# EAGLE board sound (EAGLE 5.11)
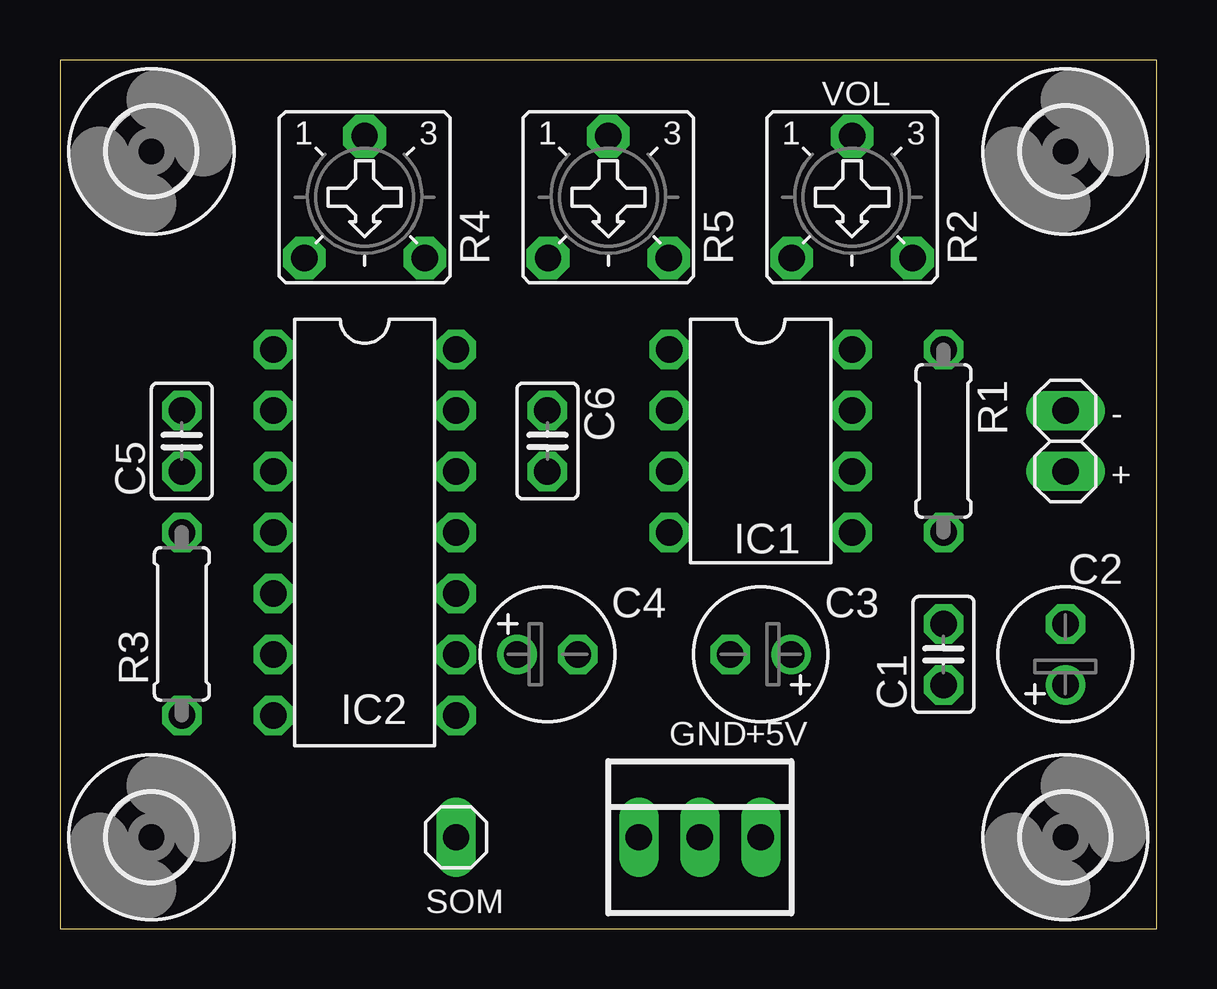
[diagram p0: board, top side]
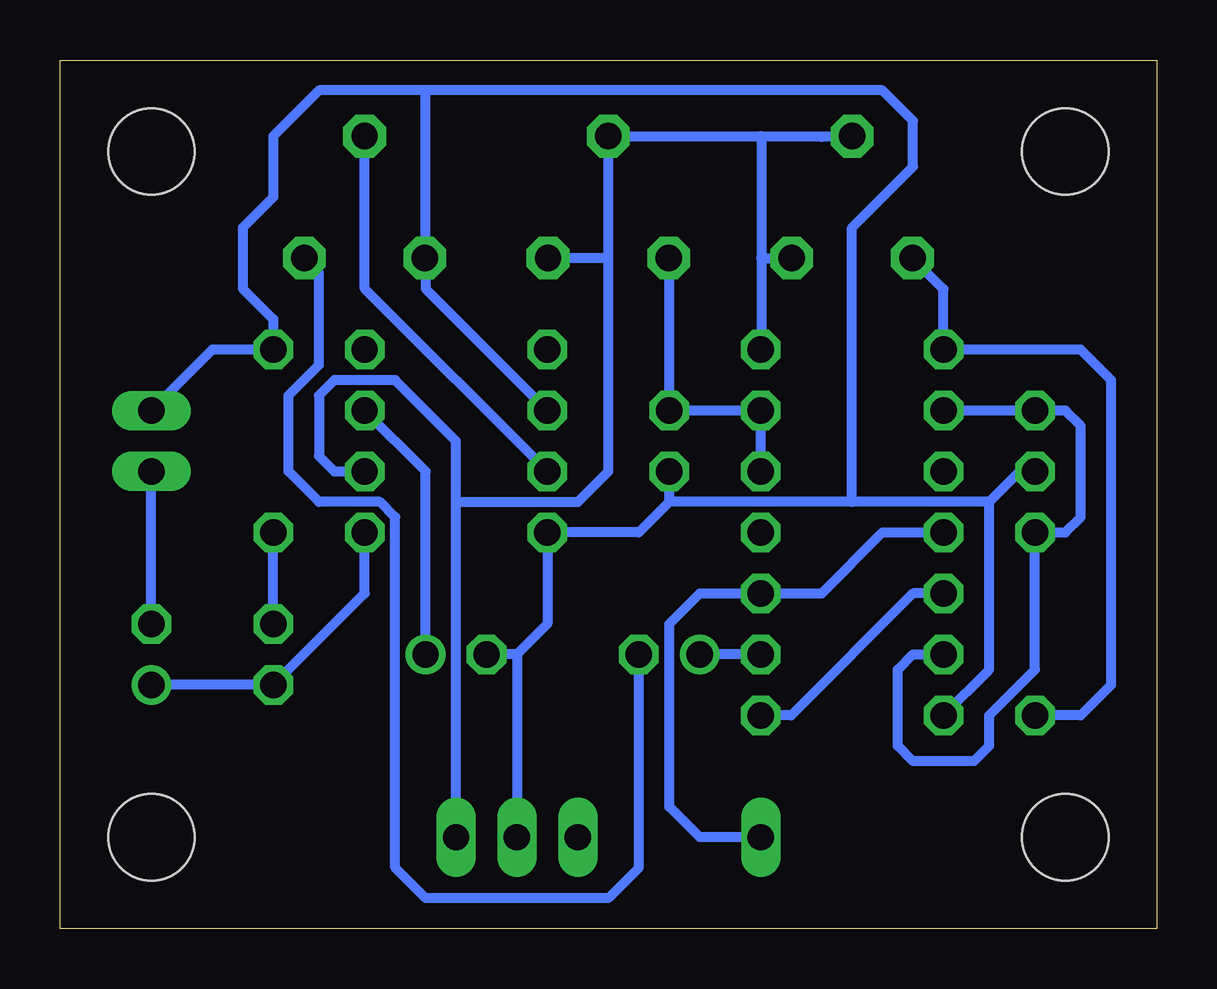
[diagram p1: board, bottom side, seen from below]

Size 45.72 x 36.2 mm. Coordinates in mm from the lower left corner, seen from the top.
Outline: 0,0 45.72,0 45.72,36.2 0,36.2 0,0
Copper layers (1*16): Top 0.035mm / dielectric 1.5mm / Bottom 0.035mm
Design rules "default": minimum track width 10mil, minimum drill 24mil, track to track 8mil, track to pad 8mil, pad to pad 8mil, via to via 8mil, smd to smd 8mil, copper to edge 40mil, drill to drill 8mil, minimum pad ring 10mil, minimum via ring 8mil, stop-mask expansion 4mil, vias tented up to drill 0mil, thermal gap 10mil

## Footprints (pad centres in the part's own frame; a part is rotated, then mirrored left to right if it is on the bottom)
C025-025X050 = drill 1.1 octagon: 1 -1.27,0; 2 1.27,0
E2,5-6 = drill 1.1 round: + -1.27,0 | drill 1.1 pad 1.6 octagon: - 1.27,0
DIL08 = drill 1.1 octagon: 1 -3.81,-3.81; 2 -1.27,-3.81; 3 1.27,-3.81; 4 3.81,-3.81; 5 3.81,3.81; 6 1.27,3.81; 7 -1.27,3.81; 8 -3.81,3.81
DIL14 = drill 1.1 octagon: 1 -7.62,-3.81; 2 -5.08,-3.81; 3 -2.54,-3.81; 4 0,-3.81; 5 2.54,-3.81; 6 5.08,-3.81; 7 7.62,-3.81; 8 7.62,3.81; 9 5.08,3.81; 10 2.54,3.81; 11 0,3.81; 12 -2.54,3.81; 13 -5.08,3.81; 14 -7.62,3.81
1X01 = drill 1.1 long: 1 0,0
0207/7 = drill 1.1 octagon: 1 -3.81,0; 2 3.81,0
CT6 = drill 1.1 pad 1.778 octagon: A 2.515,2.54; E -2.515,2.54; S 0,-2.54
1X02 = drill 1.1 long: 1 -1.27,0; 2 1.27,0
3,6 = hole 3.6: 0,0
22-23-2031 = drill 1.1 long: 1 -2.54,0; 2 0,0; 3 2.54,0

## Placement (x,y rotation side)
C1  22nF  [C025-025X050]  36.83,11.43 90 top
C2  100uF  [E2,5-6]  41.91,11.43 90 top
C3  10uF  [E2,5-6]  29.21,11.43 180 top
C4  1uF  [E2,5-6]  20.32,11.43 0 top
C5  10nF  [C025-025X050]  5.08,20.32 90 top
C6  100nF  [C025-025X050]  20.32,20.32 270 top
IC1  LM386  [DIL08]  29.21,20.32 270 top
IC2  NE556  [DIL14]  12.7,16.51 270 top
JP1  [1X01]  16.51,3.81 0 top
R1  47  [0207/7]  36.83,20.32 270 top
R2  [CT6]  33.02,30.48 180 top
R3  1k  [0207/7]  5.08,12.7 90 top
R4  470k  [CT6]  12.7,30.48 180 top
R5  470k  [CT6]  22.86,30.48 180 top
SP1  8 OHM  [1X02]  41.91,20.32 90 top
U$1  [3,6]  3.81,3.81 0 top
U$2  [3,6]  41.91,3.81 0 top
U$3  [3,6]  41.91,32.38 0 top
U$4  [3,6]  3.81,32.38 0 top
X5  22-23-2031  [22-23-2031]  26.67,3.81 0 top

## Library data of the parts
C1-C6 IC1 IC2 JP1 R1-R5 SP1 X5 = caixa
U$1-U$4 = ruido

## Nets
+5V: IC1.6 IC2.14 R4.E R4.S R5.E R5.S X5.3
+12V: X5.1
GND: C3.- C5.1 C6.2 IC1.2 IC1.4 IC2.7 R1.1 R2.A SP1.2 X5.2
N$1: C1.2 R1.2
N$2: C3.+ IC1.7
N$3: C1.1 C2.+ IC1.5
N$4: IC2.1 R3.1 R4.A
N$5: C5.2 IC2.2 IC2.6 R3.2
N$6: IC1.3 R2.S
N$7: C4.- R2.E
N$8: C2.- SP1.1
N$12: IC2.5 IC2.8
N$13: C4.+ IC2.9
N$15: C6.1 IC2.12 IC2.13 R5.A
SOM: IC2.4 IC2.10 JP1.1

## Tracks (layer width: path | path; a pad name or v marks a point on that pad's centre or on a via)
+5V
  Bottom 0.406: 13.97,32.99 R4.S 16.51,33.02 | R5.S 16.51,33.02 | R5.S 22.86,32.99 | 16.51,33.02 16.48,32.99 16.48,27.94 | 29.21,17.78 29.21,20.32 31.75,22.86 34.29,22.86 34.92,22.23 34.92,19.68 34.29,19.05 IC1.6 | X5.3 29.21,17.78 | 29.21,17.78 24.13,17.78 22.86,19.05 22.86,27.94 | 22.86,27.94 R5.S | 22.86,27.94 R5.E | IC2.14 16.48,24.13 16.48,27.94 | 16.48,27.94 R4.E
GND
  Bottom 0.406: 26.67,11.43 25.4,12.7 IC1.4 21.59,16.51 20.32,17.78 | 26.67,11.43 C3.- | 26.67,11.43 X5.2 | 20.32,17.78 C6.2 | IC2.7 6.99,10.79 6.99,17.78 | 6.99,17.78 12.7,17.78 | 12.7,17.78 20.32,17.78 | SP1.2 39.37,24.13 R1.1 36.83,25.4 38.1,26.67 38.1,29.21 36.83,30.48 36.83,33.02 34.92,34.92 30.48,34.92 | 30.48,34.92 11.43,34.92 10.16,33.66 10.16,31.75 12.7,29.21 12.7,17.78 | C5.1 5.71,19.05 6.99,17.78 | IC1.2 30.48,26.67 30.48,27.91 R2.A 30.5,34.9 30.48,34.92
N$1
  Bottom 0.406: C1.2 R1.2
N$2
  Bottom 0.406: C3.+ 30.48,19.05 IC1.7
N$3
  Bottom 0.406: IC1.5 33.02,13.97 C1.1 C2.+
N$4
  Bottom 0.406: R3.1 3.17,8.89 1.91,10.16 1.91,22.86 3.17,24.13 IC2.1 8.89,26.64 R4.A
N$5
  Bottom 0.406: IC2.2 C5.2 3.81,21.59 3.17,20.95 3.17,17.14 3.81,16.51 R3.2 5.08,10.79 6.99,8.89 6.99,7.62 7.62,6.99 10.16,6.99 10.79,7.62 10.79,10.79 10.16,11.43 IC2.6
N$6
  Bottom 0.406: IC1.3 33.02,26.67 R2.S
N$7
  Bottom 0.406: C4.- 21.59,2.54 22.86,1.27 30.48,1.27 31.75,2.54 31.75,17.14 32.38,17.78 34.92,17.78 36.2,19.05 36.2,22.23 34.92,23.5 34.92,27.33 R2.E
N$8
  Bottom 0.406: C2.- SP1.1
N$12
  Bottom 0.406: IC2.5 10.16,13.97 15.24,8.89 IC2.8
N$13
  Bottom 0.406: IC2.9 C4.+
N$15
  Bottom 0.406: IC2.12 IC2.13 C6.1 20.32,27.91 R5.A
SOM
  Bottom 0.406: IC2.4 11.43,16.51 13.97,13.97 IC2.10 19.05,13.97 20.32,12.7 20.32,5.08 19.05,3.81 JP1.1

## Text on the board
tNames: VOL | - | + | GND | +5V | SOM